# EAGLE board OpenBook_board v1 (EAGLE 9.7.0)
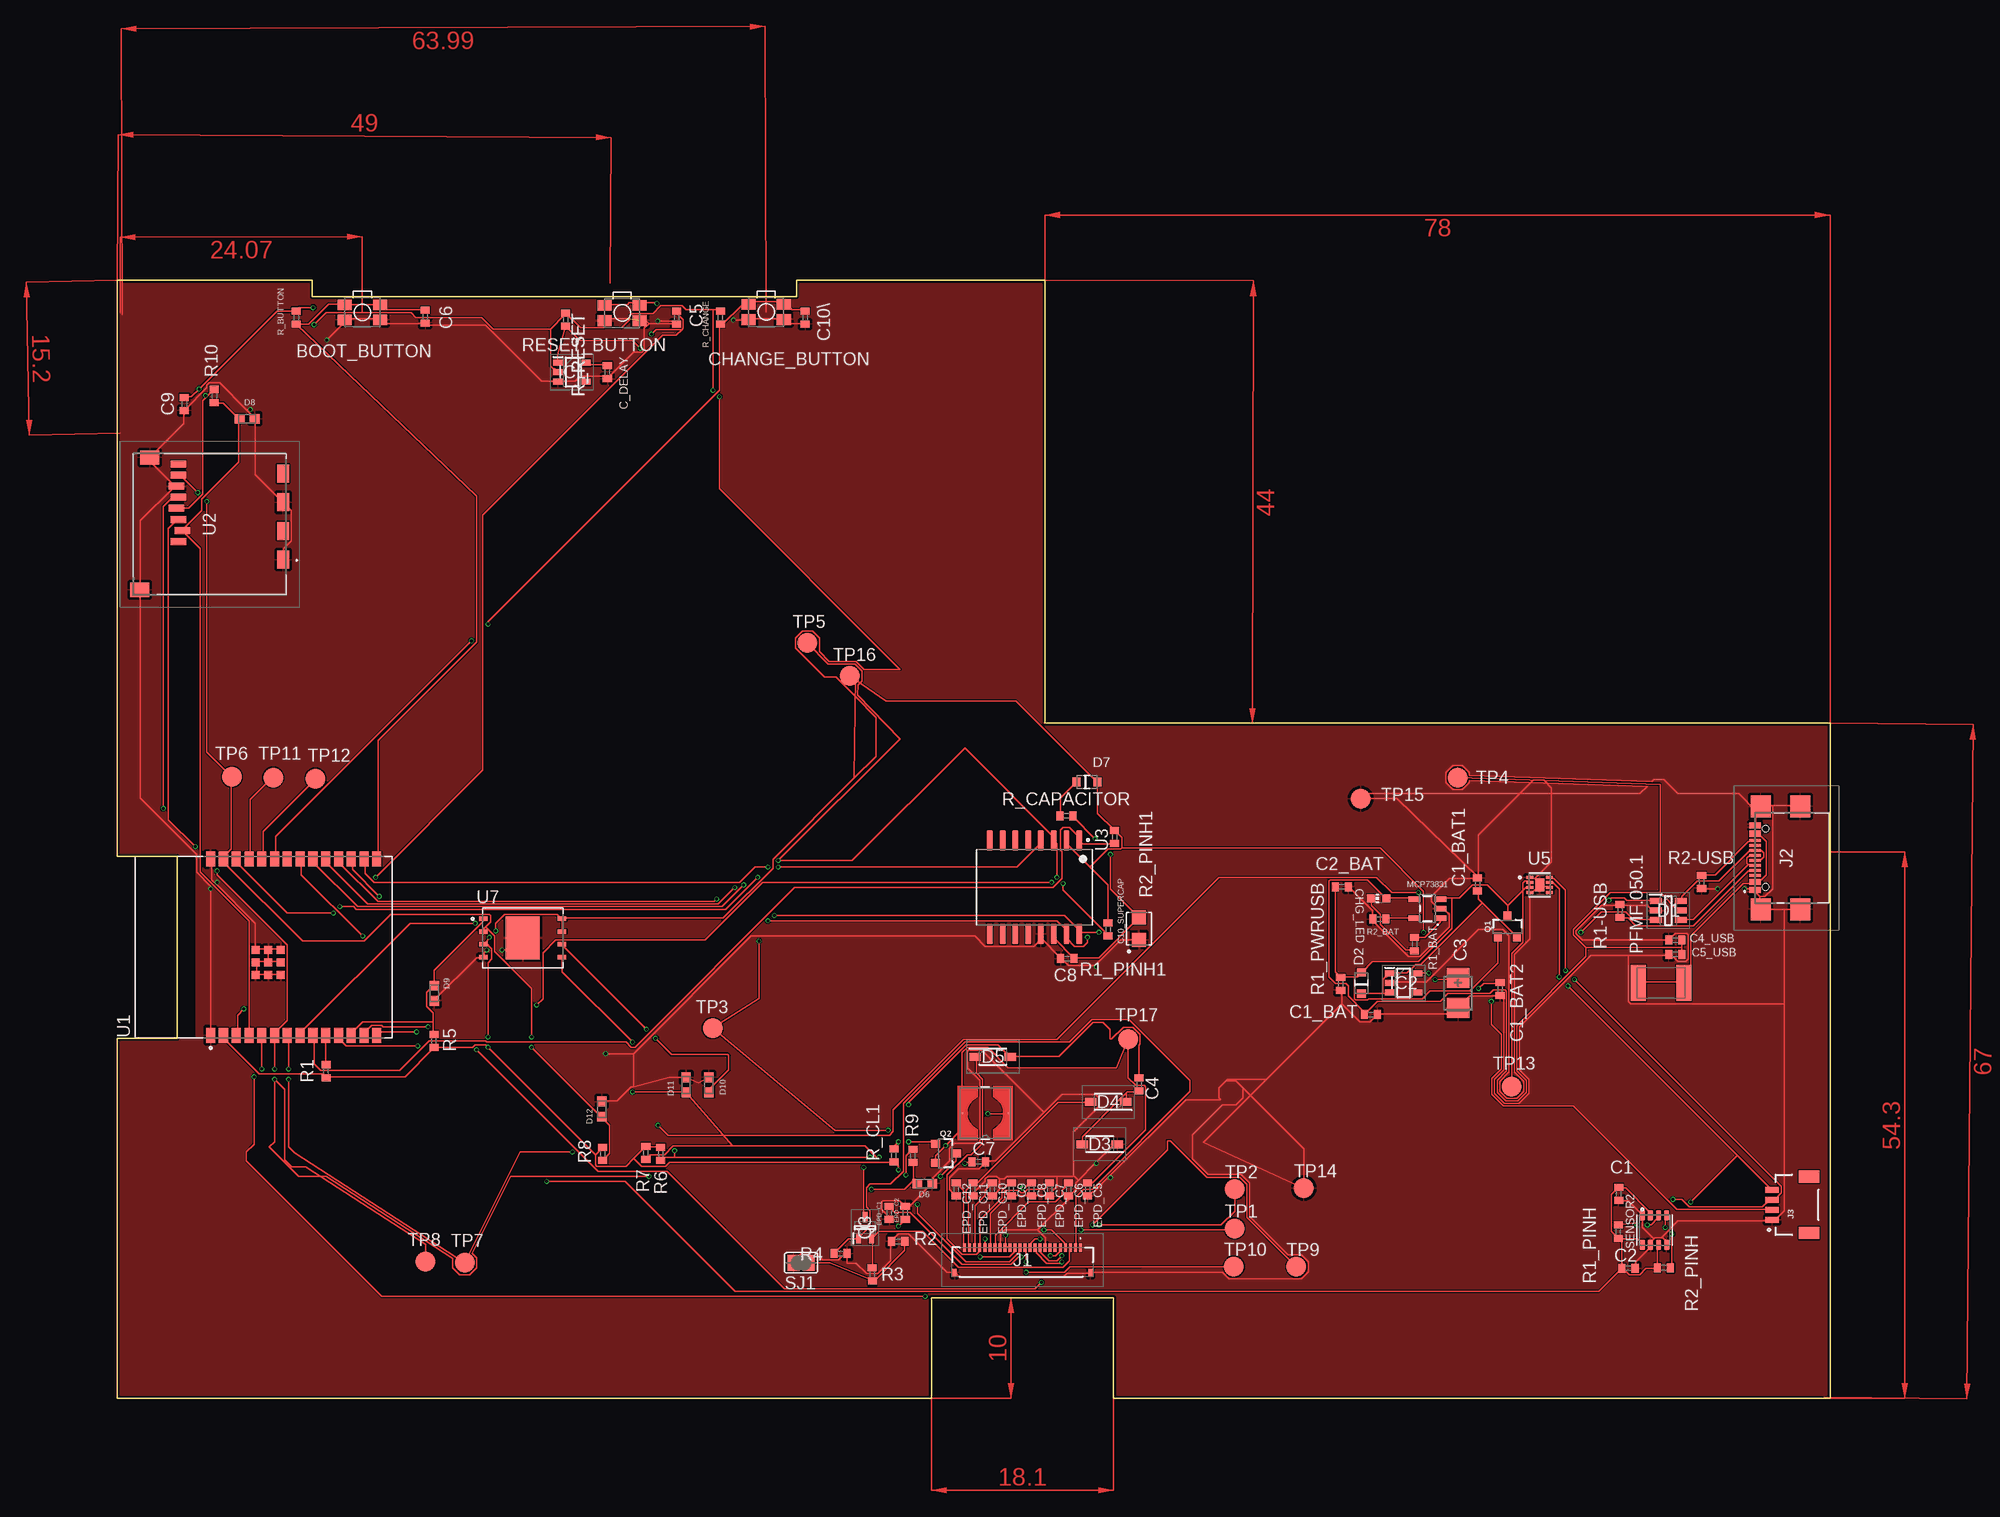
[diagram p0: board, top side]
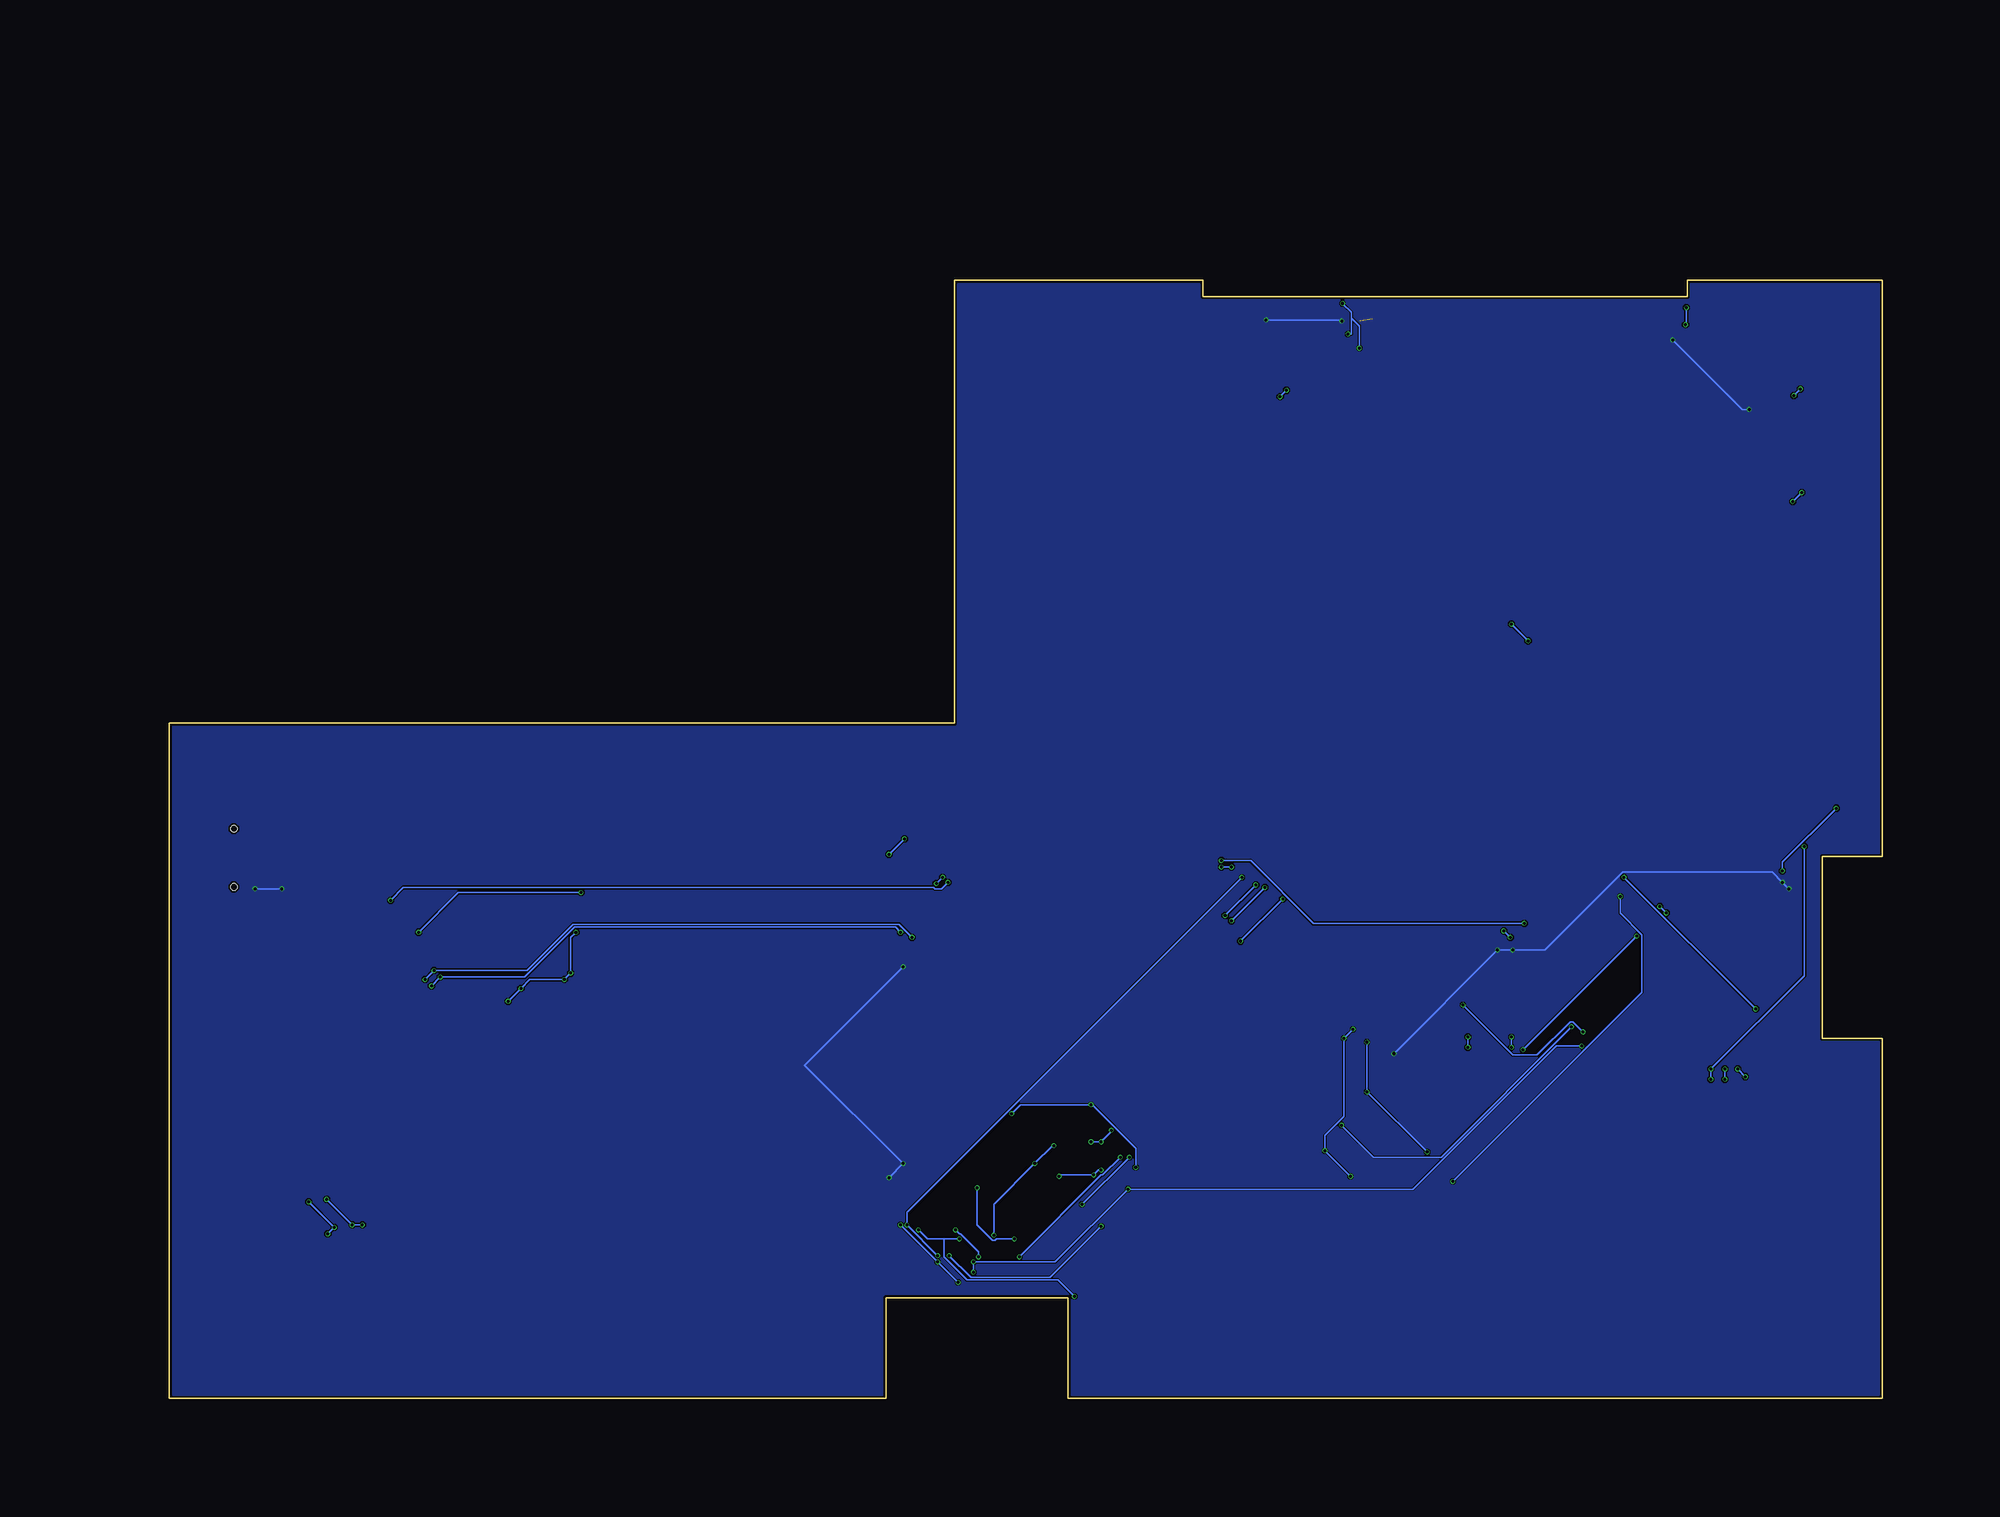
[diagram p1: board, bottom side, seen from below]

Size 170.2 x 111.1 mm. Coordinates in mm from the lower left corner, seen from the top.
Outline: 0,35.8 0,0 80.9,0 80.9,10 99,10 99,0 170.2,0 170.2,67.1 92.2,67.1 92.2,111.1 67.5,111.1 67.5,109.5 19.4,109.5 19.4,111.1 0,111.1 0,53.84 5.95,53.84 5.95,35.8 0,35.8
Copper layers (1*16): Top / Bottom
Stack-up Default Layer Stack: Top User Defined 0.035mm / Dielectric-1 User Defined 1.6mm / Bottom User Defined 0.035mm
Design rules: minimum copper width 5mil, minimum drill size 0.3mm, copper clearance wire_polygon to wire_polygon 5mil, copper clearance wire_polygon to pad_smd 5mil, copper clearance wire_polygon to via 5mil, copper clearance pad_smd to pad_smd 5mil, copper clearance pad_smd to via 5mil, copper clearance via to via 5mil, copper clearance smd to pad (same net) 5mil, copper clearance smd to via (same net) 5mil, copper clearance smd to smd (same net) 5mil, dimension clearance 0.2mm, via restrict clearance 0mil, restrict clearance 0mil, drill distance 6mil, keepout clearance 0mil

## Footprints (pad centres in the part's own frame; a part is rotated, then mirrored left to right if it is on the bottom)
MYBUTTON = smd 1.4 x 1.05: 1 1.75,0.75; 2 -1.75,0.75; 3 -1.75,-0.75; 4 1.75,-0.75
EAGLE-LTSPICE_C0402 = smd 0.7 x 0.9: 1 -0.65,0; 2 0.65,0
RCL_CT3528 = smd 2 x 2.2: + -1.5,0; - 1.5,0
CAPCP3225X100N = smd 1.4 x 1.4: 1 -1.1,0; 2 1.1,0
ADAFRUIT_CHIP-LED0603 = smd 0.8 x 0.8: A 0,-0.75; C 0,0.75
SOT95P280X145-6N = smd 1.2 x 0.6: 1 -1.25,0.95; 2 -1.25,0; 3 -1.25,-0.95; 4 1.25,-0.95; 5 1.25,0; 6 1.25,0.95
ESP32_WROVER_AVX---SD0805S020S1R0_AVX_SD0805S020S1R0_0 = smd 0.8 x 0.9: 1 -1.05,0; 2 1.05,0
SOD3716X135N = smd 1.15 x 0.8: 1 -1.75,0; 2 1.75,0
DIOC1608X36N = smd 0.97 x 0.94: 1 -0.75,0; 2 0.75,0
SOT95P280X125-5N = smd 0.9 x 0.6: 1 -1.4,0.95; 2 -1.4,0; 3 -1.4,-0.95; 4 1.4,-0.95; 5 1.4,0.95
SOT95P280X120-5N = smd 0.9 x 0.6: 1 -1.4,0.95; 2 -1.4,0; 3 -1.4,-0.95; 4 1.4,-0.95; 5 1.4,0.95
FH34SRJ24S05SH99 = smd 0.3 x 0.8: 1 5.75,1.45; 2 5.25,1.45; 3 4.75,1.45; 4 4.25,1.45; 5 3.75,1.45; 6 3.25,1.45; 7 2.75,1.45; 8 2.25,1.45; 9 1.75,1.45; 10 1.25,1.45; 11 0.75,1.45; 12 0.25,1.45; 13 -0.25,1.45; 14 -0.75,1.45; 15 -1.25,1.45; 16 -1.75,1.45; 17 -2.25,1.45; 18 -2.75,1.45; 19 -3.25,1.45; 20 -3.75,1.45; 21 -4.25,1.45; 22 -4.75,1.45; 23 -5.25,1.45; 24 -5.75,1.45 | smd 0.4 x 0.8: MP1 6.75,-1.05; MP2 -6.75,-1.05
SAMACSYS_PARTS_USB4110GFA = smd 0.3 x 1.15: A1 -3.35,3.678; A4 -2.55,3.678; A5 -1.25,3.678; A6 -0.25,3.678; A7 0.25,3.678; A8 1.25,3.678; A9 2.55,3.678; A12 3.35,3.678; B1 3.05,3.678; B4 2.25,3.678; B5 1.75,3.678; B6 0.75,3.678; B7 -0.75,3.678; B8 -1.75,3.678; B9 -2.25,3.678; B12 -3.05,3.678 | smd 2.18 x 2: MP1 -5.11,-0.827; MP2 5.11,-0.827; MP3 -5.11,3.103; MP4 5.11,3.103 | hole 0.65: -2.89,2.603; 2.89,2.603
JST04_1MM_RA = smd 0.6 x 1.35: 1 -1.5,0; 2 -0.5,0; 3 0.5,0; 4 1.5,0 | smd 1.2 x 2: NC1 2.8,-3.675; NC2 -2.8,-3.675
IND_4828-WE-TPC_WRE = smd 0.127 x 0.127: 1 -2.286,0; 2 2.286,0
ESP32_WROVER_SPARKFUN-IC-POWER_SOT23-5 = smd 0.55 x 1.2: 1 -0.95,-1.3; 2 0,-1.3; 3 0.95,-1.3; 4 0.95,1.3; 5 -0.95,1.3
ESP32C6_VARISTOR_CT/CN1812 = smd 1.5 x 3.6: 1 -2.25,0; 2 2.25,0
ESP32_WROVER_SPARKFUN-DISCRETESEMI_SOT23-3 = smd 0.8 x 0.9: 1 -0.95,-1; 2 0.95,-1; 3 0,1.1
SOT65P210X110-3N = smd 1.05 x 0.5: 1 -1.05,0.65; 2 -1.05,-0.65; 3 1.05,0
ESP32_WROVER_EAGLE-LTSPICE_R0402 = smd 0.7 x 0.9: 1 -0.65,0; 2 0.65,0
ESP32_WROVER_BME680_PSON80P300X300X100-8N = smd 1.016 x 0.5: 1 1.458,1.2; 2 1.458,0.4; 3 1.458,-0.4; 4 1.458,-1.2; 5 -1.458,-1.22; 6 -1.458,-0.4; 7 -1.458,0.4; 8 -1.458,1.2
SJ = smd 1.168 x 1.6: 1 -0.762,0; 2 0.762,0
TP20R = smd 2 x 2: TP 0,0
XCVR_ESP32-C6-WROOM-1-N8 = smd 1.5 x 0.9: 1 -8.75,5.26; 2 -8.75,3.99; 3 -8.75,2.72; 4 -8.75,1.45; 5 -8.75,0.18; 6 -8.75,-1.09; 7 -8.75,-2.36; 8 -8.75,-3.63; 9 -8.75,-4.9; 10 -8.75,-6.17; 11 -8.75,-7.44; 12 -8.75,-8.71; 13 -8.75,-9.98; 14 -8.75,-11.25; 15 8.75,-11.25; 16 8.75,-9.98; 17 8.75,-8.71; 18 8.75,-7.44; 19 8.75,-6.17; 20 8.75,-4.9; 21 8.75,-3.63; 22 8.75,-2.36; 23 8.75,-1.09; 24 8.75,0.18; 25 8.75,1.45; 26 8.75,2.72; 27 8.75,3.99; 28 8.75,5.26 | smd 0.8 x 0.8: 29_1 -2.755,0.79; 29_2 -1.505,0.79; 29_3 -0.255,0.79; 29_4 -2.755,-0.46; 29_5 -1.505,-0.46; 29_6 -0.255,-0.46; 29_7 -2.755,-1.71; 29_8 -1.505,-1.71; 29_9 -0.255,-1.71
112ATAARR03ATTEND = smd 1.8 x 1.2: G1 10.6,10.4; G2 4.9,10.4; S1 7.75,10.4; S2 2.05,10.4 | smd 1.4 x 1.9: G3 13.6,-3.85; G4 0.45,-2.85 | smd 0.7 x 1.5: P1 8.8,0; P2 7.7,0.4; P3 6.6,0; P4 5.5,-0.2; P5 4.4,0; P6 3.3,-0.2; P7 2.2,0; P8 1.1,0
SOIC127P1032X265-16N = smd 2.05 x 0.59: 1 -4.655,4.445; 2 -4.655,3.175; 3 -4.655,1.905; 4 -4.655,0.635; 5 -4.655,-0.635; 6 -4.655,-1.905; 7 -4.655,-3.175; 8 -4.655,-4.445; 9 4.655,-4.445; 10 4.655,-3.175; 11 4.655,-1.905; 12 4.655,-0.635; 13 4.655,0.635; 14 4.655,1.905; 15 4.655,3.175; 16 4.655,4.445
SON50P200X200X80-9N = smd 0.76 x 0.27: 1 -0.985,0.75; 2 -0.985,0.25; 3 -0.985,-0.25; 4 -0.985,-0.75; 5 0.985,-0.75; 6 0.985,-0.25; 7 0.985,0.25; 8 0.985,0.75 | smd 0.9 x 1.3: 9 0,0
SON127P600X800X80-9N = smd 0.94 x 0.44: 1 -3.895,1.905; 2 -3.895,0.635; 3 -3.895,-0.635; 4 -3.895,-1.905; 5 3.895,-1.905; 6 3.895,-0.635; 7 3.895,0.635; 8 3.895,1.905 | smd 3.4 x 4.3: 9 0,0

## Placement (x,y rotation side)
BOOT_BUTTON  [MYBUTTON]  24.37,107.93 180 top
C1  100nF  [EAGLE-LTSPICE_C0402]  149.19,20.34 270 top
C1_BAT  4.7uF  [EAGLE-LTSPICE_C0402]  124.58,38.14 0 top
C1_BAT1  4.7uF  [EAGLE-LTSPICE_C0402]  135.17,51.08 90 top
C1_BAT2  4.7uF  [EAGLE-LTSPICE_C0402]  137.41,40.68 270 top
C2  100nF  [EAGLE-LTSPICE_C0402]  150.17,12.94 0 top
C2_BAT  4.7uF  [EAGLE-LTSPICE_C0402]  121.69,50.84 0 top
C3  100uF  [RCL_CT3528]  133.24,40.29 270 top
C4  4.7uF/25V  [EAGLE-LTSPICE_C0402]  101.53,31.2 90 top
C4_USB  100nF  [EAGLE-LTSPICE_C0402]  154.82,45.54 180 top
C5  1uF  [EAGLE-LTSPICE_C0402]  55.59,107.41 270 top
C5_USB  4.7uF  [EAGLE-LTSPICE_C0402]  154.81,44.14 180 top
C6  100nF  [EAGLE-LTSPICE_C0402]  30.62,107.51 270 top
C7  10uF  [EAGLE-LTSPICE_C0402]  85.61,23.52 0 top
C8  100nF  [EAGLE-LTSPICE_C0402]  94.4,43.72 180 top
C9  100nF  [EAGLE-LTSPICE_C0402]  6.68,98.82 270 top
C10\  100nF  [EAGLE-LTSPICE_C0402]  68.36,107.41 270 top
C10_SUPERCAP  CPH3225A  [CAPCP3225X100N]  101.53,46.68 90 top
C_DELAY  100nF  [EAGLE-LTSPICE_C0402]  48.71,101.98 270 top
CHANGE_BUTTON  [MYBUTTON]  64.49,107.95 180 top
CHG_LED  [ADAFRUIT_CHIP-LED0603]  125.35,49.69 90 top
D1  USBLC6-2SC6Y  [SOT95P280X145-6N]  154.12,48.48 0 top
D2  ESP32_WROVER_AVX---SD0805S020S1R0_AVX_SD0805S020S1R0_0_0AVX_SD0805S020S1R0_0_0  [ESP32_WROVER_AVX---SD0805S020S1R0_AVX_SD0805S020S1R0_0]  123.61,41.27 90 top
D3  MBR0530  [SOD3716X135N]  97.63,25.26 180 top
D4  MBR0530  [SOD3716X135N]  98.47,29.46 180 top
D5  MBR0530  [SOD3716X135N]  87.01,33.96 0 top
D6  PGB1010603MR  [DIOC1608X36N]  80.25,21.36 0 top
D7  ESP32_WROVER_AVX---SD0805S020S1R0_AVX_SD0805S020S1R0_0_0AVX_SD0805S020S1R0_0_0  [ESP32_WROVER_AVX---SD0805S020S1R0_AVX_SD0805S020S1R0_0]  96.36,61.27 0 top
D8  PGB1010603MR  [DIOC1608X36N]  12.93,97.36 0 top
D9  PGB1010603MR  [DIOC1608X36N]  31.51,40.26 270 top
D10  PGB1010603MR  [DIOC1608X36N]  58.79,31.16 90 top
D11  PGB1010603MR  [DIOC1608X36N]  56.53,31.16 90 top
D12  PGB1010603MR  [DIOC1608X36N]  48.15,28.76 90 top
EPD_C1  1uF/50V  [EAGLE-LTSPICE_C0402]  76.7,18.46 270 top
EPD_C2  1uF/50V  [EAGLE-LTSPICE_C0402]  78.31,18.46 90 top
EPD_C5  1uF/50V  [EAGLE-LTSPICE_C0402]  96.42,20.76 270 top
EPD_C6  1uF/50V  [EAGLE-LTSPICE_C0402]  94.53,20.76 270 top
EPD_C7  1uF/50V  [EAGLE-LTSPICE_C0402]  92.64,20.76 270 top
EPD_C8  1uF/50V  [EAGLE-LTSPICE_C0402]  90.85,20.76 270 top
EPD_C9  1uF/50V  [EAGLE-LTSPICE_C0402]  88.86,20.76 270 top
EPD_C10  1uF/50V  [EAGLE-LTSPICE_C0402]  86.95,20.78 270 top
EPD_C11  1uF/50V  [EAGLE-LTSPICE_C0402]  85.03,20.78 270 top
EPD_C12  1uF/50V  [EAGLE-LTSPICE_C0402]  83.38,20.78 270 top
IC1  BD5229G-TR  [SOT95P280X125-5N]  45.19,101.98 0 top
IC2  XC6220A331MR-G  [SOT95P280X120-5N]  127.83,41.28 0 top
J1  FH34SRJ-24S-0.5SH_99_  [FH34SRJ24S05SH99]  89.96,13.54 0 top
J2  [SAMACSYS_PARTS_USB4110GFA]  166.41,53.71 90 top
J3  QWIIC_RIGHT_ANGLE  [JST04_1MM_RA]  164.43,19.24 90 top
L1  744043680IND_4828-WE-TPC_WRE  [IND_4828-WE-TPC_WRE]  86.27,28.35 180 top
MCP73831  [ESP32_WROVER_SPARKFUN-IC-POWER_SOT23-5]  130.18,48.68 90 top
PFMF.050.1  [ESP32C6_VARISTOR_CT/CN1812]  153.41,41.28 0 top
Q1  20V/4.2A/52mΩ/1.4W  [ESP32_WROVER_SPARKFUN-DISCRETESEMI_SOT23-3]  138.13,46.86 0 top
Q2  20V/4.2A/52mΩ/1.4W  [ESP32_WROVER_SPARKFUN-DISCRETESEMI_SOT23-3]  82.3,24.36 270 top
Q3  SI1308EDL-T1-GE3  [SOT65P210X110-3N]  74.31,16.97 90 top
R1  10K  [ESP32_WROVER_EAGLE-LTSPICE_R0402]  20.77,32.52 90 top
R1-USB  5k1  [ESP32_WROVER_EAGLE-LTSPICE_R0402]  149.32,48.44 270 top
R1_BAT  200  [ESP32_WROVER_EAGLE-LTSPICE_R0402]  128.9,45.14 270 top
R1_PINH  10K  [ESP32_WROVER_EAGLE-LTSPICE_R0402]  149.15,16.58 270 top
R1_PINH1  10K  [ESP32_WROVER_EAGLE-LTSPICE_R0402]  98.45,46.6 90 top
R1_PWRUSB  100k  [ESP32_WROVER_EAGLE-LTSPICE_R0402]  121.57,41.2 90 top
R2  2.2  [ESP32_WROVER_EAGLE-LTSPICE_R0402]  77.61,15.6 0 top
R2-USB  5k1  [ESP32_WROVER_EAGLE-LTSPICE_R0402]  157.43,51.34 270 top
R2_BAT  2K  [ESP32_WROVER_EAGLE-LTSPICE_R0402]  125.41,47.64 0 top
R2_PINH  10K  [ESP32_WROVER_EAGLE-LTSPICE_R0402]  153.69,12.98 180 top
R2_PINH1  10K  [ESP32_WROVER_EAGLE-LTSPICE_R0402]  99.11,55.8 90 top
R3  0.47  [ESP32_WROVER_EAGLE-LTSPICE_R0402]  75.03,12.32 91 top
R4  10k  [ESP32_WROVER_EAGLE-LTSPICE_R0402]  71.89,14.4 180 top
R5  10K  [ESP32_WROVER_EAGLE-LTSPICE_R0402]  31.49,35.52 270 top
R6  10K  [ESP32_WROVER_EAGLE-LTSPICE_R0402]  54.01,24.32 90 top
R7  10K  [ESP32_WROVER_EAGLE-LTSPICE_R0402]  52.53,24.42 90 top
R8  10K  [ESP32_WROVER_EAGLE-LTSPICE_R0402]  48.25,24.32 90 top
R9  10K  [ESP32_WROVER_EAGLE-LTSPICE_R0402]  79.07,24.12 90 top
R10  10K  [ESP32_WROVER_EAGLE-LTSPICE_R0402]  9.65,99.62 90 top
R_BUTTON  10K  [ESP32_WROVER_EAGLE-LTSPICE_R0402]  17.81,107.41 270 top
R_CAPACITOR  15  [ESP32_WROVER_EAGLE-LTSPICE_R0402]  94.34,57.88 0 top
R_CHANGE  10K  [ESP32_WROVER_EAGLE-LTSPICE_R0402]  59.94,107.41 270 top
R_CL1  10K  [ESP32_WROVER_EAGLE-LTSPICE_R0402]  77.19,24.14 90 top
R_RESET  10K  [ESP32_WROVER_EAGLE-LTSPICE_R0402]  44.57,107.21 270 top
RESET_BUTTON  [MYBUTTON]  50.18,107.85 180 top
SENSOR2  BME688  [ESP32_WROVER_BME680_PSON80P300X300X100-8N]  152.75,16.73 90 top
SJ1  [SJ]  67.96,13.48 0 top
TP1  TPTP20R  [TP20R]  111.03,16.9 0 top
TP2  TPTP20R  [TP20R]  111.05,20.8 0 top
TP3  TPTP20R  [TP20R]  59.17,36.8 0 top
TP4  TPTP20R  [TP20R]  133.19,61.7 0 top
TP5  TPTP20R  [TP20R]  68.59,75.08 0 top
TP6  TPTP20R  [TP20R]  11.41,61.78 0 top
TP7  TPTP20R  [TP20R]  34.53,13.48 0 top
TP8  TPTP20R  [TP20R]  30.65,13.58 0 top
TP9  TPTP20R  [TP20R]  117.17,13.08 0 top
TP10  TPTP20R  [TP20R]  110.96,13.1 0 top
TP11  TPTP20R  [TP20R]  15.51,61.7 0 top
TP12  TPTP20R  [TP20R]  19.71,61.6 0 top
TP13  TPTP20R  [TP20R]  138.56,31 0 top
TP14  TPTP20R  [TP20R]  117.91,20.9 0 top
TP15  TPTP20R  [TP20R]  123.56,59.6 0 top
TP16  TPTP20R  [TP20R]  72.81,71.8 0 top
TP17  TPTP20R  [TP20R]  100.46,35.7 0 top
U1  ESP32-C6-WROOM-1-N8  [XCVR_ESP32-C6-WROOM-1-N8]  14.55,44.84 90 top
U2  112A-TAAR-R03_ATTEND  [112ATAARR03ATTEND]  6.09,93.95 270 top
U3  DS3231SN#  [SOIC127P1032X265-16N]  91.15,50.8 270 top
U5  MAX17048G+T10  [SON50P200X200X80-9N]  141.34,51.03 0 top
U7  W25Q512JVEIQ  [SON127P600X800X80-9N]  40.3,45.76 0 top

## Library data of the parts
BOOT_BUTTON CHANGE_BUTTON CHG_LED PFMF.050.1 RESET_BUTTON SJ1 TP1-TP17 = DeskAssistant v19 v1
C1 C1_BAT C1_BAT1 C1_BAT2 C2 C2_BAT C4 C4_USB C5 C5_USB C6-C9 C10\ C_DELAY EPD_C1 EPD_C2 EPD_C5-EPD_C12 = DeskAssistant v19 v1; SPICEMODEL: NONE; SPICEPREFIX: C
C3 = DeskAssistant v19 v1; SPICEPREFIX: C
C10_SUPERCAP = DeskAssistant v19 v1; AVAILABILITY: Not in stock; CHECK_PRICES: https://www.snapeda.com/parts/CPH3225A/Seiko+Instruments/view-part/?ref=eda; DESCRIPTION: 11 mF (EDLC) Supercapacitor 3.3 V 1210 (3225 Metric) - -; MF: Seiko Instruments; MP: CPH3225A; PACKAGE: 1210 Seiko; PRICE: None; PURCHASE-URL: https://www.snapeda.com/api/url_track_click_mouser/?unipart_id=562593&manufacturer=Seiko Instruments&part_name=CPH3225A&search_term=None; SNAPEDA_LINK: https://www.snapeda.com/parts/CPH3225A/Seiko+Instruments/view-part/?ref=snap
D1 = DeskAssistant v19 v1; AVAILABILITY: In Stock; CHECK_PRICES: https://www.snapeda.com/parts/USBLC6-2SC6Y/STMicroelectronics/view-part/?ref=eda; DESCRIPTION: 17V Clamp 5A (8/20µs) Ipp Tvs Diode Surface Mount SOT-23-6; MF: STMicroelectronics; MP: USBLC6-2SC6Y; PACKAGE: SOT-23-6 STMicroelectronics; PRICE: None; SNAPEDA_LINK: https://www.snapeda.com/parts/USBLC6-2SC6Y/STMicroelectronics/view-part/?ref=snap
D2 D7 = DeskAssistant v19 v1; CENTROID_NOT_SPECIFIED: No; DATASHEET: http://datasheets.avx.com/schottky.pdf; DIGIKEY_DESCRIPTION: DIODE SCHOTTKY 20V 1A 0805; DIGIKEY_PART_NUMBER: 478-7800-1-ND; LEAD_FREE: yes; MF: AVX; MOUSER_PART_NUMBER: 581-SD0805S020S1R0; PACKAGE: 0805 (2012 metric); PREFIX: D; ROHS: yes; TEMPERATURE_RANGE_HIGH: +125°C; TEMPERATURE_RANGE_LOW: -55°C
D3-D5 = DeskAssistant v19 v1; AVAILABILITY: In Stock; CHECK_PRICES: https://www.snapeda.com/parts/MBR0530/Onsemi/view-part/?ref=eda; DESCRIPTION: Diode Schottky 30 V 500mA Surface Mount SOD-123; MF: ON Semiconductor; MP: MBR0530; PACKAGE: SOD-123-2 ON Semiconductor; PRICE: None; PURCHASE-URL: https://www.snapeda.com/api/url_track_click_mouser/?unipart_id=179458&manufacturer=ON Semiconductor&part_name=MBR0530&search_term=None; SNAPEDA_LINK: https://www.snapeda.com/parts/MBR0530/Onsemi/view-part/?ref=snap
D6 D8-D12 = DeskAssistant v19 v1; AVAILABILITY: In Stock; CHECK_PRICES: https://www.snapeda.com/parts/PGB1010603MR/Littelfuse/view-part/?ref=eda; DESCRIPTION: 150V (Typ) Clamp - Ipp Tvs Diode Surface Mount 0603 (1608 Metric); MF: Littelfuse Inc.; MP: PGB1010603MR; PACKAGE: 0603 Littelfuse Inc.; PRICE: None; PURCHASE-URL: https://www.snapeda.com/api/url_track_click_mouser/?unipart_id=5659453&manufacturer=Littelfuse Inc.&part_name=PGB1010603MR&search_term=None; SNAPEDA_LINK: https://www.snapeda.com/parts/PGB1010603MR/Littelfuse/view-part/?ref=snap
IC1 = DeskAssistant v19 v1; DESCRIPTION: Voltage Detector with Adjustable Delay Time: CMOS processes are utilized to develop high precision, low current consumption CMOS reset ICs that allow arbitrary setting of the delay time. The extensive lineup includes both Nch Open Drain and CMOS output types in a wide range of detection voltages (from 2.3V to 6.0V, in 0.1V steps), enabling selection of the ideal solution based on customer requirements. In addition, the entire series is of course both lead-free and RoHS-compliant.; HEIGHT: 1.25mm; MANUFACTURER_NAME: ROHM Semiconductor; MANUFACTURER_PART_NUMBER: BD5229G-TR; MOUSER_PART_NUMBER: 755-BD5229G-TR; MOUSER_PRICE-STOCK: https://www.mouser.co.uk/ProductDetail/ROHM-Semiconductor/BD5229G-TR?qs=4kLU8WoGk0vvnhrrYwdszw%3D%3D
IC2 = DeskAssistant v19 v1; DESCRIPTION: LDO Voltage Regulators; HEIGHT: 1.2mm; MANUFACTURER_NAME: Torex; MANUFACTURER_PART_NUMBER: XC6220A331MR-G; MOUSER_PART_NUMBER: 865-XC6220A331MR-G; MOUSER_PRICE-STOCK: https://www.mouser.co.uk/ProductDetail/Torex-Semiconductor/XC6220A331MR-G?qs=AsjdqWjXhJ8ZSWznL1J0gg%3D%3D
J1 = DeskAssistant v19 v1; DESCRIPTION: 24 Position FFC, FPC Connector Contacts, Top and Bottom 0.020" (0.50mm) Surface Mount, Right Angle; HEIGHT: 1.1mm; MANUFACTURER_NAME: Hirose; MANUFACTURER_PART_NUMBER: FH34SRJ-24S-0.5SH(99); MOUSER_PART_NUMBER: 798-FH34SRJ24S05SH99; MOUSER_PRICE-STOCK: https://www.mouser.co.uk/ProductDetail/Hirose-Connector/FH34SRJ-24S-0.5SH99?qs=vcbW%252B4%252BSTIpKBl5ap9J8Fw%3D%3D
J2 = DeskAssistant v19 v1; DESCRIPTION: CONN USB 2.0 TYPE-C R/A SMT; HEIGHT: 3.26mm; MANUFACTURER_NAME: GCT (GLOBAL CONNECTOR TECHNOLOGY); MANUFACTURER_PART_NUMBER: USB4110-GF-A; MOUSER_PART_NUMBER: 640-USB4110-GF-A; MOUSER_PRICE-STOCK: https://www.mouser.co.uk/ProductDetail/GCT/USB4110-GF-A?qs=KUoIvG%2F9IlYiZvIXQjyJeA%3D%3D
J3 = DeskAssistant v19 v1; PROD_ID: CONN-13694
L1 = DeskAssistant v19 v1; COPYRIGHT: Copyright (C) 2024 Ultra Librarian. All rights reserved.; MANUFACTURER_PART_NUMBER: 744043680; MFR_NAME: Wurth Electronics
MCP73831 = DeskAssistant v19 v1; PROD_ID: IC-09995
Q1 Q2 = DeskAssistant v19 v1; PROD_ID: TRAN-14388
Q3 = DeskAssistant v19 v1; AVAILABILITY: In Stock; CHECK_PRICES: https://www.snapeda.com/parts/SI1308EDL-T1-GE3/Vishay+Siliconix/view-part/?ref=eda; DESCRIPTION: Si1308EDL-T1-GE3 N-channel MOSFET Transistor, 1.5 A, 30 V, 3-Pin SC-70 | Siliconix / Vishay SI1308EDL-T1-GE3; MF: Vishay Siliconix; MP: SI1308EDL-T1-GE3; PACKAGE: SOT-323 Vishay Semiconductor; PRICE: None; PURCHASE-URL: https://www.snapeda.com/api/url_track_click_mouser/?unipart_id=274603&manufacturer=Vishay Siliconix&part_name=SI1308EDL-T1-GE3&search_term=None; SNAPEDA_LINK: https://www.snapeda.com/parts/SI1308EDL-T1-GE3/Vishay+Siliconix/view-part/?ref=snap
R1 R1-USB R1_BAT R1_PINH R1_PINH1 R1_PWRUSB R2 R2-USB R2_BAT R2_PINH R2_PINH1 R3-R10 R_BUTTON R_CAPACITOR R_CHANGE R_CL1 R_RESET = DeskAssistant v19 v1; SPICEMODEL: NONE; SPICEPREFIX: R
SENSOR2 = DeskAssistant v19 v1; AVAILABILITY: Unavailable; DESCRIPTION: Integrated Environmental Unit; MF: Bosch Sensortec; MP: BME680; PACKAGE: LGA-8 Bosch Tools; PRICE: None
U1 = DeskAssistant v19 v1; AVAILABILITY: In Stock; CHECK_PRICES: https://www.snapeda.com/parts/ESP32-C6-WROOM-1-N8/Espressif+Systems/view-part/?ref=eda; DESCRIPTION: Multiprotocol Modules ESP32-C6 module, Wi-Fi 6 in 2.4 GHz band, Bluetooth 5, Zigbee 3.0 and Thread. ESP34-WROOM Compatible - ENGINEERING SAMPLE; MF: Espressif Systems; MP: ESP32-C6-WROOM-1-N8; PACKAGE: None; PRICE: None; SNAPEDA_LINK: https://www.snapeda.com/parts/ESP32-C6-WROOM-1-N8/Espressif+Systems/view-part/?ref=snap
U2 = DeskAssistant v19 v1; DESCRIPTION: Micro SD Card Socket, Push-Push Type, Top Mount, SMT, H=1.83mm, 10u; HEIGHT: 1.9mm; MANUFACTURER_NAME: ATTEND; MANUFACTURER_PART_NUMBER: 112A-TAAR-R03 ATTEND
U3 = DeskAssistant v19 v1; AVAILABILITY: In Stock; CHECK_PRICES: https://www.snapeda.com/parts/DS3231SN%23/Analog+Devices/view-part/?ref=eda; DESCRIPTION: Extremely Accurate I²C-Integrated RTC/TCXO/Crystal; MF: Analog Devices; MP: DS3231SN#; PACKAGE: SOIC-16 Maxim; PRICE: None; PURCHASE-URL: https://www.snapeda.com/api/url_track_click_mouser/?unipart_id=99048&manufacturer=Analog Devices&part_name=DS3231SN#&search_term=None; SNAPEDA_LINK: https://www.snapeda.com/parts/DS3231SN%23/Analog+Devices/view-part/?ref=snap
U5 = DeskAssistant v19 v1; AVAILABILITY: In Stock; CHECK_PRICES: https://www.snapeda.com/parts/MAX17048G+T10/Analog+Devices/view-part/?ref=eda; DESCRIPTION: 3µA 1-Cell/2-Cell Fuel Gauge with ModelGauge; MF: Analog Devices; MP: MAX17048G+T10; PACKAGE: TDFN-8 Maxim; PRICE: None; PURCHASE-URL: https://www.snapeda.com/api/url_track_click_mouser/?unipart_id=329239&manufacturer=Analog Devices&part_name=MAX17048G+T10&search_term=None; SNAPEDA_LINK: https://www.snapeda.com/parts/MAX17048G+T10/Analog+Devices/view-part/?ref=snap
U7 = DeskAssistant v19 v1; AVAILABILITY: In Stock; CHECK_PRICES: https://www.snapeda.com/parts/W25Q512JVEIQ/Winbond+Electronics/view-part/?ref=eda; DESCRIPTION: FLASH - NOR Memory IC 512Mb (64M x 8) SPI - Quad I/O 133 MHz 8-WSON (8x6); MF: Winbond Electronics; MP: W25Q512JVEIQ; PACKAGE: Package; PRICE: None; SNAPEDA_LINK: https://www.snapeda.com/parts/W25Q512JVEIQ/Winbond+Electronics/view-part/?ref=snap

## Nets
3V3: C1_BAT2.1 C3.+ C9.1 D7.2 IC1.2 IC2.5 J3.2 Q2.3 R1.1 R1_PINH1.2 R2_PINH1.2 R5.2 R6.2 R7.2 R8.2 R9.2 R10.2 R_BUTTON.1 R_CHANGE.1 R_CL1.1 R_RESET.1 TP16.TP U1.2 U2.P4 U3.2 U7.3 U7.7 U7.8
32KHZ: R2_PINH1.1 U1.9 U3.1
DN: D1.4 J2.A7 J2.B7
DP: D1.6 J2.A6 J2.B6
EPD_3V3: C7.1 EPD_C5.1 J1.15 J1.16 L1.2 Q2.2 TP17.TP
EPD_3V3_C: Q2.1 R_CL1.2 TP3.TP U1.18
EPD_BUSY: J1.9 TP9.TP U1.26
EPD_CS: D6.1 J1.12 R9.1 TP10.TP U1.11
EPD_DC: J1.11 TP1.TP U1.5
EPD_RST: J1.10 TP2.TP U1.21
FLASH_CS: D9.1 R5.1 U1.12 U7.1
GDR: J1.2 Q3.1 R4.2
GND: BOOT_BUTTON.1 BOOT_BUTTON.2 C1.2 C1_BAT1.2 C1_BAT2.2 C1_BAT.2 C2.2 C2_BAT.2 C3.- C4_USB.2 C5.2 C5_USB.2 C6.2 C7.2 C8.2 C9.2 C10\.2 C10_SUPERCAP.1 C_DELAY.2 CHANGE_BUTTON.1 CHANGE_BUTTON.2 D1.2 D3.1 D6.2 D8.2 D9.2 D10.2 D11.2 D12.2 EPD_C1.2 EPD_C2.2 EPD_C5.2 EPD_C6.2 EPD_C7.2 EPD_C8.2 EPD_C9.2 EPD_C10.2 EPD_C11.2 EPD_C12.2 IC1.3 IC2.2 J1.8 J1.17 J1.MP1 J1.MP2 J2.A1 J2.A12 J2.B1 J2.B12 J2.MP1 J2.MP2 J2.MP3 J2.MP4 J3.1 MCP73831.2 R1-USB.1 R1_PWRUSB.1 R2-USB.2 R2.1 R2_BAT.1 R4.1 RESET_BUTTON.1 RESET_BUTTON.2 SENSOR2.1 SENSOR2.5 SENSOR2.7 SJ1.1 TP14.TP TP15.TP U1.1 U1.28 U1.29_1 U1.29_2 U1.29_3 U1.29_4 U1.29_5 U1.29_6 U1.29_7 U1.29_8 U1.29_9 U2.G1 U2.G2 U2.G3 U2.G4 U2.P6 U3.13 U5.1 U5.4 U5.6 U5.9 U7.4 U7.9
GPIO8: R1.2 U1.10
I2C_PW: C1.1 C2.1 R1_PINH.2 R2_PINH.2 SENSOR2.2 SENSOR2.6 SENSOR2.8 U1.17
INT_RTC: R1_PINH1.1 TP5.TP U1.8 U3.3
IO/BOOT: BOOT_BUTTON.3 BOOT_BUTTON.4 C6.1 R_BUTTON.2 U1.15
IO/CHANGE: C10\.1 CHANGE_BUTTON.3 CHANGE_BUTTON.4 R_CHANGE.2 U1.23
MISO: D12.1 R8.1 TP6.TP U1.27 U2.P7 U7.2
MOSI: D11.1 J1.14 R7.1 TP7.TP U1.7 U2.P3 U7.5
N$1: J2.B5 R2-USB.1
N$2: J2.A5 R1-USB.2
N$3: MCP73831.5 R2_BAT.2
N$4: EPD_C2.1 J1.5
N$5: C1_BAT1.1 D2.1 IC2.1 IC2.3 Q1.2
N$6: MCP73831.1 R1_BAT.1
N$7: C4.1 D3.2 D4.1
N$8: CHG_LED.C R1_BAT.2
N$9: EPD_C1.1 J1.4
N$10: EPD_C12.1 J1.24
N$11: C_DELAY.1 IC1.5
N$12: EPD_C10.1 J1.22
N$13: D7.1 R_CAPACITOR.1
N$14: EPD_C8.1 J1.20
N$15: EPD_C7.1 J1.19
N$16: EPD_C6.1 J1.18
PREVGH: D5.1 EPD_C9.1 J1.21
PREVGL: D4.2 EPD_C11.1 J1.23
RESE: J1.3 Q3.2 R3.2
RESE': R2.2 R3.1 SJ1.2
RESET: C5.1 IC1.1 R_RESET.2 RESET_BUTTON.3 RESET_BUTTON.4 U1.3
RTC_RST: U1.16 U3.4
RX: TP12.TP U1.24
SCK: D10.1 J1.13 R6.1 TP8.TP U1.6 U2.P5 U7.6
SCL: J3.4 R2_PINH.1 SENSOR2.4 U1.20 U3.16 U5.7
SDA: J3.3 R1_PINH.1 SENSOR2.3 U1.19 U3.15 U5.8
SRC: C4.2 D5.2 L1.1 Q3.3
SS_SD: D8.1 R10.1 U1.4 U2.P2
TX: TP11.TP U1.25
USB_D+: D1.1 U1.14
USB_D-: D1.3 U1.13
VBAT: C2_BAT.1 D2.2 MCP73831.3 Q1.1 Q1.3 R1_PWRUSB.2 TP13.TP U5.2 U5.3
VBUS: C1_BAT.1 C4_USB.1 C5_USB.1 CHG_LED.A D1.5 MCP73831.4 TP4.TP
VRTC: C8.1 C10_SUPERCAP.2 R_CAPACITOR.2 U3.14
VUSB: J2.A4 J2.A9 J2.B4 J2.B9 PFMF.050.1.1 PFMF.050.1.2

## Tracks (layer width: path | path; a pad name or v marks a point on that pad's centre or on a via)
3V3  (via drill 0.3)
  Top 0.127: U1.2 10.69,36.04 10.69,35.66 14.12,32.23 20.47,32.23 20.72,31.98 R1.1 20.85,31.98 28.59,31.98 31.39,34.77 R5.2 31.51,34.9 35.32,34.9 35.58,35.15 36.59,35.15 v36.85,34.9 47.52,24.23 | 47.52,24.23 48.15,24.86 R8.2 | 47.52,24.23 47.52,23.21 47.64,23.09 50.56,23.09 51.33,23.85 | 51.33,23.85 52.47,24.99 R7.2 52.6,24.99 53.99,24.99 R6.2 | 51.33,23.85 52.09,23.09 54.5,23.09 54.88,23.47 77.11,23.47 R_CL1.1 77.23,23.47 77.62,23.09 v77.62,22.7 | v78.38,22.2 78.38,24.1 79.01,24.74 R9.2 | v81.81,22.07 83.33,23.59 83.33,24.36 Q2.3 | 43.07,106.27 43.07,102.59 43.33,102.33 43.45,102.33 43.71,102.08 IC1.2 | 43.07,106.27 44.48,107.68 R_RESET.1 46.05,106.38 50.14,106.38 50.94,107.18 50.94,107.6 51.15,107.82 53.23,107.82 54.01,108.6 56.12,108.6 56.54,108.17 59.2,108.17 | 59.2,108.17 59.84,108.17 R_CHANGE.1 | 8.91,99.54 8.53,99.16 8.53,89.89 7.13,88.49 5.99,88.49 U2.P4 | 8.91,99.54 9.54,100.17 R10.2 | C9.1 6.75,99.54 7.39,99.54 v8.15,100.3 15.89,108.05 17.79,108.05 R_BUTTON.1 18.09,108.38 v19.47,108.38 | v8.78,99.67 8.91,99.54 | 43.07,106.27 37.36,106.27 36.21,107.41 29.68,107.41 29.2,107.9 20.76,107.9 v19.56,106.7 | v130.32,42.26 129.31,42.26 IC2.5 | v130.96,41.63 132.99,41.63 133.12,41.75 C3.+ | v135.27,40.74 135.78,41.25 137.31,41.25 C1_BAT2.1 | v136.54,39.47 136.54,37.18 137.54,36.18 137.54,32.74 136.61,31.81 136.61,30.19 137.75,29.05 144.68,29.05 154.96,18.77 164.36,18.77 J3.2 | 96.67,52.8 94.38,55.09 94.38,55.34 U3.2 | 96.67,52.8 98.44,51.02 98.44,47.34 R1_PINH1.2 | 36.59,45.31 36.98,45.69 v36.98,45.82 | 36.59,45.31 36.47,45.18 U7.3 36.59,45.31 | v37.61,46.45 37.61,47.22 38.5,48.1 43.71,48.1 44.09,47.72 U7.8
  Top 0.127: U7.7 44.21,46.45 44.21,47.6 U7.8 | 73.24,61.63 65.17,53.56 65.17,52.68 60.22,47.72 44.21,47.72 U7.8 | 73.24,61.63 73.36,71.79 TP16.TP 76.41,69.31 89.3,69.31 97.3,61.31 D7.2 97.43,61.19 97.43,58.14 99.08,56.49 R2_PINH1.2 99.21,56.36 99.84,55.72 99.84,54.71 | 96.67,52.8 98.44,54.58 99.71,54.58 99.84,54.71 | v129.81,46.33 129.81,50.39 125.5,54.71 99.84,54.71 | v59.2,100.17 59.2,108.17 | v59.84,99.54 59.84,90.4 77.78,72.45 74.2,72.45 73.41,73.24 70.75,73.24 69.78,74.22 69.78,75.57 69.08,76.27 68.1,76.27 67.4,75.57 67.4,74.59 70.3,71.68 71.44,71.68 73.41,69.71 75.4,67.64 75.4,63.8 73.24,61.63 | v36.85,35.91 36.85,43.28 37.23,43.66 37.23,44.67 36.59,45.31
  Bottom 0.127: v77.62,22.7 77.87,22.7 v78.38,22.2 81.68,22.2 v81.81,22.07 | v8.15,100.3 v8.78,99.67 | v136.54,39.47 v135.27,40.74 134.39,41.63 v130.96,41.63 v130.32,42.26 130.32,45.82 v129.81,46.33 | v37.61,46.45 v36.98,45.82 | v59.84,99.54 v59.2,100.17 | v36.85,35.91 v36.85,34.9 | v19.56,106.7 19.47,106.78 v19.47,108.38
32KHZ
  Top 0.127: R2_PINH1.1 99.08,55.09 95.9,55.09 95.65,55.34 U3.1 95.52,55.47 95.52,55.85 94.63,56.74 94,56.74 93.75,56.49 93.75,54.45 93.87,54.33 93.87,51.66 92.98,50.77 67.33,50.77 51.45,34.9 51.07,34.9 50.56,35.4 36.72,35.4 36.59,35.53 31.01,35.53 28.09,32.61 20.21,32.61 19.58,33.24 19.58,36.04 U1.9
DN
  Top 0.127: 162.07,53.06 162.71,53.06 J2.B7 | 162.07,53.06 161.94,53.18 161.94,53.69 162.2,53.95 162.71,53.95 J2.A7 | 162.07,53.06 156.61,47.6 155.47,47.6 D1.4
DP
  Top 0.127: J2.A6 162.83,53.56 163.34,53.56 163.59,53.82 163.59,54.2 163.34,54.45 162.83,54.45 J2.B6 162.71,54.45 162.2,54.45 159.15,51.41 156.99,51.41 155.47,49.88 155.47,49.5 D1.6
EPD_3V3  (via drill 0.3)
  Top 0.127: 88.28,15.08 88.67,15.08 J1.15 | 83.97,28.29 83.97,26.77 v82.32,25.12 81.3,24.1 81.3,23.47 Q2.2 | v84.22,23.34 84.35,23.47 84.86,23.47 C7.1 | v88.28,16.23 88.28,15.08 | 88.28,15.08 J1.16 | EPD_C5.1 96.54,21.43 96.92,21.43 102.17,26.68 102.17,30.98 102.06,31.09 101.22,31.09 100.46,31.85 TP17.TP 99.31,32.86 88.54,32.86 86.51,34.9 84.47,34.9 83.97,34.39 83.97,28.29 | 83.97,28.29 L1.2
  Bottom 0.127: v82.32,25.12 82.44,25.12 v84.22,23.34 88.28,19.27 v88.28,16.23
EPD_3V3_C  (via drill 0.3)
  Top 0.127: v77.62,25.5 77.23,25.12 77.23,24.86 R_CL1.2 | v78.63,25.5 81.05,25.5 81.17,25.37 Q2.1 | v59.58,49.63 59.33,49.37 25.93,49.37 22.12,53.18 22.12,53.56 U1.18 | v63.77,45.44 63.77,39.74 TP3.TP 71.32,26.64 v76.6,26.64
  Bottom 0.127: v78.63,25.5 v77.62,25.5 76.6,26.51 v76.6,26.64 | v63.77,45.44 v59.58,49.63
EPD_BUSY  (via drill 0.3)
  Top 0.127: v93.87,14.2 93.36,13.69 92.6,13.69 91.71,14.58 91.71,14.96 J1.9 | v21.48,48.23 16.91,48.23 11.96,53.18 11.96,53.56 U1.26 | v22.12,48.87 23.51,48.87 23.77,48.61 60.47,48.61 v63.65,51.79 | v96.92,17.24 104.36,24.68 104.36,25.59 104.66,25.59 108.26,21.99 111.54,21.99 112.24,21.29 112.24,18.01 TP9.TP
  Bottom 0.127: v93.87,14.2 v96.92,17.24 96.92,18.51 v63.65,51.79 | v22.12,48.87 v21.48,48.23
EPD_CS  (via drill 0.3)
  Top 0.127: v90.32,13.56 90.32,14.96 J1.12 | 79.14,21.69 79.14,23.47 R9.1 | 79.14,21.69 79.39,21.43 D6.1 79.14,21.69 | v29.86,35.02 22.75,35.02 22.12,35.66 22.12,36.04 U1.11 | v74.95,20.8 78.25,20.8 79.14,21.69 | TP10.TP 101.69,13.1 101.67,13.08 94.69,13.08 94.15,12.54 v90.32,12.54
  Bottom 0.127: v90.32,12.54 v90.32,13.56 82.19,13.56 v74.95,20.8 46.63,20.8 32.4,35.02 v29.86,35.02
EPD_DC  (via drill 0.3)
  Top 0.127: v91.71,15.85 91.21,15.85 90.82,15.46 90.82,15.08 J1.11 | v95.78,16.73 111.03,16.73 TP1.TP | v14.37,32.74 14.37,36.04 U1.5 | v13.61,31.98 13.61,25.24 12.85,24.48 12.85,23.59 26.31,10.13 v80.28,10.13
  Bottom 0.127: 93.24,15.85 94.89,15.85 v95.78,16.73 | 93.24,15.85 v91.71,15.85 | v13.61,31.98 v14.37,32.74 | v80.28,10.13 81.93,11.78 90.95,11.78 93.24,14.07 93.24,15.85
EPD_RST  (via drill 0.3)
  Top 0.127: v93.87,13.56 93.75,13.43 92.35,13.43 91.33,14.45 91.33,14.96 J1.10 | v24.4,45.95 18.31,52.04 18.31,53.56 U1.21 | v35.71,34.64 47.77,22.58 54.65,22.58 66.33,10.89 91.21,10.89 v91.84,11.53 | v97.56,17.24 109.69,17.24 111.05,18.6 TP2.TP
  Bottom 0.127: v97.56,17.24 v93.87,13.56 v91.84,11.53 | v35.71,34.64 v24.4,45.95
FLASH_CS
  Top 0.127: 31.39,37.44 31.39,38.33 30.75,38.96 30.75,40.36 31.39,40.99 D9.1 31.51,41.12 31.51,42.52 36.34,47.34 36.34,47.6 U7.1 | 31.39,37.44 31.39,36.29 R5.1 | 31.39,37.44 24.4,37.44 23.39,36.42 23.39,36.17 U1.12
GDR
  Top 0.127: J1.2 95.27,15.08 95.27,20.04 96.03,20.8 96.92,20.8 106.61,30.49 106.61,31.59 100.56,37.64 96.86,37.64 94.62,35.4 84.22,35.4 78.12,29.31 78.12,22.58 76.85,21.31 74.82,21.31 74.44,20.93 74.44,19.02 74.82,18.64 74.82,17.12 73.68,15.97 Q3.1 73.55,15.85 72.66,15.85 71.27,14.45 R4.2
GND  (via drill 0.3)  (1 unrouted)
  Top 0.127: C2_BAT.2 122.45,50.77 124.73,48.48 124.73,47.72 R2_BAT.1 124.86,47.6 124.86,47.34 128.29,43.91 129.43,43.91 132.35,46.83 132.35,48.1 131.84,48.61 131.59,48.61 MCP73831.2 131.46,48.74 131.21,48.74 130.58,49.37 130.58,49.88 132.35,51.66 135.15,51.66 C1_BAT1.2 135.27,51.79 | 141.24,50.9 141.37,51.02 U5.9 | 141.24,50.9 140.74,50.39 140.48,50.39 U5.4 140.35,50.26 140.35,45.66 138.81,44.12 138.81,32.43 139.75,31.49 139.75,30.51 139.05,29.81 138.07,29.81 137.37,30.51 137.37,31.49 138.31,32.43 138.31,45.96 137.69,46.58 135.27,46.58 130.07,41.37 126.51,41.37 IC2.2 | 141.24,50.9 142.26,50.9 U5.6 | 141.24,50.9 U5.9 | 140.86,51.66 140.48,51.66 U5.1 | 140.86,51.66 141.37,51.15 U5.9 | 135.27,51.79 135.27,55.98 140.74,61.44 141.75,61.44 142.51,60.68 142.51,53.31 140.86,51.66 | C1.2 149.24,19.66 150.13,19.66 151.53,18.26 SENSOR2.1 151.53,18.13 151.53,16.99 152.67,15.85 | C2.2 150.9,13.05 150.9,13.56 152.29,14.96 152.29,15.21 SENSOR2.7 152.42,15.34 152.42,15.59 152.67,15.85 | 153.44,15.97 152.8,15.97 152.67,15.85 | 153.44,15.97 153.56,15.97 153.94,15.59 153.94,15.34 SENSOR2.5 | 153.44,15.97 155.09,17.62 164.36,17.62 J3.1 164.48,17.75 164.74,17.75 165.63,18.64 165.63,39.21 | v159.02,50.64 157.5,50.64 R2-USB.2 | 162.71,50.64 v161.69,50.64 | 162.71,50.64 162.71,50.39 J2.A1 162.83,50.26 163.21,49.88 | 162.71,50.64 J2.B12 | 163.21,49.88 163.21,48.61 J2.MP3 163.34,48.61 165.63,48.61 | 165.63,48.61 167.15,48.61 J2.MP1 | J2.B1 162.71,56.87 162.71,56.99 J2.A12 162.83,57.12 162.83,58.39 | 162.83,58.39 163.21,58.77 J2.MP4 | 162.83,58.39 161.13,60.09 155.08,60.09 153.68,61.49 152.7,61.49 152.51,61.3 134.38,61.91 134.38,62.19 133.68,62.89 132.7,62.89 132,62.19 132,61.21 132.7,60.51 133.68,60.51 134.38,61.21 134.38,61.41 152.01,60.81 151.3,60.09 124.05,60.09 TP15.TP 127.17,59.6 135.27,51.79
  Top 0.127: 162.83,58.39 J2.MP4 | 164.48,58.9 163.34,58.9 J2.MP4 | 164.48,58.9 167.15,58.9 J2.MP2 | 163.21,49.88 163.72,49.88 164.48,50.64 164.48,58.9 | 165.63,48.61 165.63,39.21 | EPD_C1.2 76.6,17.88 76.6,18.13 75.97,18.77 75.97,19.53 76.09,19.66 77.74,19.66 78.25,19.15 EPD_C2.2 78.38,19.15 78.76,19.15 80.92,21.31 D6.2 81.05,21.43 81.05,21.94 82.7,23.59 82.7,24.86 83.2,25.37 85.62,25.37 85.74,25.5 85.74,31.59 84.47,32.86 84.47,34.52 84.6,34.64 85.87,34.64 92.09,28.42 | EPD_C12.2 83.33,20.16 82.7,20.8 82.7,21.94 83.59,22.83 85.62,22.83 86.25,23.47 C7.2 86.38,23.59 87.27,23.59 92.09,28.42 | EPD_C9.2 88.92,20.16 90.82,20.16 EPD_C8.2 90.95,20.16 92.6,20.16 EPD_C7.2 92.73,20.16 92.73,20.42 93.36,21.05 93.36,22.07 | 87.65,21.82 87.4,22.07 86.51,22.07 86.25,21.82 86.25,21.56 85.11,20.42 85.11,20.16 EPD_C11.2 | 87.65,21.82 87.65,20.8 87.01,20.16 EPD_C10.2 | 91.46,16.73 88.16,16.73 87.78,16.35 87.78,15.08 J1.17 | 91.46,16.73 92.22,15.97 92.22,15.08 J1.8 | 91.46,16.73 94.51,19.78 94.51,20.04 EPD_C6.2 94.63,20.16 95.27,20.8 95.27,21.43 95.52,21.69 | 95.52,21.69 97.17,23.34 | 97.17,23.34 99.08,25.24 99.33,25.24 D3.1 | 87.65,21.82 88.16,21.82 88.41,22.07 93.36,22.07 | 95.02,22.07 95.14,22.07 95.52,21.69 | 95.02,22.07 93.36,22.07 | 92.09,28.42 93.87,30.2 97.23,30.2 97.48,29.94 97.48,28.98 95.02,26.51 95.02,22.07 | 98.57,22.07 97.05,20.55 96.92,20.55 96.54,20.16 EPD_C5.2 | D1.2 152.8,48.48 152.55,48.48 152.04,48.99 149.37,48.99 R1-USB.1 149.24,48.99 147.47,48.99 144.93,46.45 144.93,46.2 145.56,45.56 154.07,45.56 C4_USB.2 154.2,45.56 154.83,46.2 155.97,46.2 156.1,46.07 156.1,43.66 155.85,43.41 155.09,43.41 154.45,44.04 154.2,44.04 C5_USB.2 154.07,44.04 150.13,44.04
  Top 0.127: 121.69,39.21 123.46,37.44 124.48,37.44 125.11,38.07 C1_BAT.2 125.24,38.2 132.61,38.2 133.12,38.71 C3.- 133.24,38.83 134.39,39.98 137.31,39.98 C1_BAT2.2 137.8,39.64 137.8,32.64 136.86,31.7 136.86,30.3 137.86,29.3 139.26,29.3 140.26,30.3 140.26,31.7 139.32,32.64 139.32,36.91 146.45,44.04 150.13,44.04 | 121.69,39.21 121.69,40.48 R1_PWRUSB.1 | 121.69,39.21 114.19,31.72 | 114.19,31.72 107.93,25.46 TP14.TP 117.91,24.82 111.86,30.87 | v97.3,23.34 97.17,23.34 | 98.57,22.07 v98.7,21.94 | 165.63,39.21 150.39,39.21 150.13,39.47 150.13,44.04 | 51.33,30.96 51.07,30.96 49.68,29.56 48.15,29.56 D12.2 | 51.33,30.96 54.86,31.91 D11.2 57.75,31.35 D10.2 | 91.84,45.69 93.75,43.79 C8.2 93.87,43.66 94.51,43.02 97.17,43.02 | 91.84,45.69 91.84,46.07 U3.13 91.84,45.69 | 97.17,43.02 99.71,45.56 101.49,45.56 C10_SUPERCAP.1 | 51.33,34.26 51.33,30.96 | 51.33,34.26 63.01,45.95 85.24,45.95 86.25,44.93 91.08,44.93 91.84,45.69 | 62.81,107.29 62.74,107.48 | 22.24,107.29 26.05,107.29 BOOT_BUTTON.2 26.3,106.78 30.38,106.78 C6.2 30.75,106.65 36.59,106.65 42.18,101.06 43.71,101.06 IC1.3 43.83,101.06 45.48,101.06 45.99,101.57 48.53,101.57 48.66,101.44 C_DELAY.2 48.79,101.44 51.29,103.95 52.14,103.95 52.38,104.19 52.38,106.33 52.83,106.78 | 22.74,107.29 BOOT_BUTTON.1 22.62,106.64 22.3,106.64 v20.83,105.17 | 52.09,107.29 52.13,107.38 | 52.83,106.78 52.13,107.38 | 52.13,107.38 51.93,107.56 RESET_BUTTON.2 | 5.61,90.78 5.86,90.78 U2.P6 5.61,90.78 | 5.61,90.78 3.32,93.06 3.32,93.44 U2.G4 3.32,93.57 6.62,96.87 6.62,98.14 C9.2 6.75,98.27 8.91,100.43 8.91,100.68 9.16,100.94 10.18,100.94 12.85,98.27
  Top 0.127: U2.G1 16.53,83.41 16.53,84.43 17.29,85.19 17.29,88.24 16.53,89 U2.G2 16.4,89.12 13.74,91.79 13.74,97.25 D8.2 13.74,97.38 12.85,98.27 | D9.2 31.51,39.59 35.71,43.79 36.34,43.79 U7.4 36.47,43.91 36.47,44.29 v36.72,44.55 | v38.25,44.55 39.13,44.55 40.28,45.69 U7.9 | U1.29_8 16.15,43.41 15.13,43.41 U1.29_5 15.01,43.41 | 13.86,42.13 13.86,43.28 U1.29_2 13.86,43.41 15.01,43.41 | U1.29_7 16.15,42.13 15.13,42.13 U1.29_4 15.01,42.13 13.86,42.13 | 13.86,42.13 U1.29_1 | U1.29_6 15.01,44.67 13.86,44.67 U1.29_3 13.74,44.67 13.74,47.22 9.8,51.15 | U1.29_9 16.15,44.67 15.13,44.67 U1.29_6 | 9.8,51.15 9.42,51.53 9.42,53.56 U1.28 | 15.01,43.41 15.01,44.55 U1.29_6 | U1.1 9.29,36.17 v9.29,50.64 9.29,50.9 7.89,52.3 7.89,54.07 2.31,59.66 2.31,80.23 U2.G3 2.31,80.36 2.31,87.22 5.61,90.52 5.61,90.78 | 9.8,51.15 v9.93,51.28 | 12.85,98.27 v13.23,98.27 | v48.53,34.26 51.33,34.26 | 97.17,43.02 v97.3,42.9 | 110.18,31.57 111.16,31.57 111.86,30.87 | 111.86,30.87 111.86,29.89 111.16,29.19 109.84,29.19 106.83,26.18 106.83,23.78 108.37,22.24 111.65,22.24 112.49,21.4 112.49,18.11 116.34,14.27 117.66,14.27 118.36,13.57 118.36,12.59 117.66,11.89 116.68,11.89 116.66,11.91 110.47,11.91 109.83,12.54 96.79,12.54 J1.MP1 96.67,12.42 94.38,12.42 94,12.04 83.71,12.04 83.33,12.42 J1.MP2 83.2,12.54 82.44,12.54 78.63,16.35 77.62,16.35 76.98,15.72 R2.1 76.85,15.59 76.85,13.69 75.58,12.42 74.44,12.42 73.43,13.43 72.54,13.43 72.54,14.32 R4.1 72.31,14.4 71.67,13.76 70.1,13.76 69.39,14.47 68.06,14.47 67.2,13.61 SJ1.1 | 114.19,31.72 110.33,31.72 109.48,30.87 109.48,29.89 109.65,29.72 109.6,29.67 106.17,29.67 98.57,22.07
  Top 0.127: 52.83,106.78 55.57,106.78 C5.2 55.28,107.07 v53.7,107.07 | RESET_BUTTON.1 48.62,107.29 50.68,107.29 | CHANGE_BUTTON.1 62.74,107.48 | CHANGE_BUTTON.2 66.24,107.48 | 66.24,107.48 66.95,106.78 68.34,106.78 C10\.2 | 66.24,107.48 66.04,107.29 62.38,107.29 | v61.23,107.16 62.42,107.16 62.74,107.48
  Bottom 0.127: v161.69,50.64 v159.02,50.64 | v98.7,21.94 v97.3,23.34 107.08,33.12 v97.3,42.9 | v9.29,50.64 v9.93,51.28 10.94,52.3 25.8,52.3 33.55,44.55 v36.72,44.55 v38.25,44.55 v48.53,34.26 | v20.83,105.17 13.93,98.27 v13.23,98.27 | v61.23,107.16 53.8,107.16 v53.7,107.07
  pour Bottom: 80.9,10 99,10 99,0 170.2,0 170.2,67.1 92.1,67.1 92.1,111.1 67.5,111.1 67.5,109.5 19.4,109.5 19.4,111.1 0,111.1 0,0 80.9,0
  pour Top: 80.9,10 99,10 99,0 170.2,0 170.2,67.1 92.1,67.1 92.1,111.1 67.5,111.1 67.5,109.5 19.4,109.5 19.4,111.1 0,111.1 0,0 80.9,0
GPIO8
  Top 0.127: R1.2 20.72,33.24 20.72,36.04 U1.10
I2C_PW  (via drill 0.3)
  Top 0.127: SENSOR2.2 152.29,18.26 152.29,18.51 149.88,20.93 149.24,20.93 C1.1 149.12,20.93 148.48,20.29 148.48,16.61 149.12,15.97 R1_PINH.2 | SENSOR2.6 153.05,15.21 153.05,13.05 R2_PINH.2 152.93,12.93 151.91,12.93 151.28,12.29 150.26,12.29 149.62,12.93 C2.1 | 149.5,15.85 151.02,15.85 151.53,15.34 SENSOR2.8 | 149.5,15.85 149.24,15.85 R1_PINH.2 | 149.5,15.85 149.5,13.05 C2.1 | 149.5,15.85 R1_PINH.2 | v26.05,49.88 23.39,52.55 23.39,53.56 U1.17 | v42.69,21.56 50.48,21.56 61.4,10.64 147.21,10.64 149.5,12.93 C2.1
  Bottom 0.127: v26.05,49.88 26.05,48.23 23.89,46.07 23.89,40.36 v42.69,21.56
INT_RTC  (via drill 0.3)
  Top 0.127: v94,51.15 94,50.52 98.44,46.07 R1_PINH1.1 | v93.36,51.79 93.36,55.09 93.11,55.34 U3.3 92.98,55.47 92.98,55.85 84.22,64.61 73.04,53.44 v65.68,53.44 77.78,65.54 73.59,69.89 73.6,70.91 74,71.31 74,72.29 73.3,72.99 70.65,72.99 68.59,75.05 TP5.TP | v35.58,47.22 29.1,47.22 18.31,36.42 18.31,36.17 U1.8
  Bottom 0.127: v93.36,51.79 v94,51.15 | v35.58,47.22 56.53,47.22 62.76,53.44 v65.68,53.44
IO/BOOT
  Top 0.127: C6.1 30.61,108.17 26.33,108.17 BOOT_BUTTON.3 25.55,108.68 22.24,108.68 BOOT_BUTTON.4 22.57,108.75 21,108.75 19.01,106.76 R_BUTTON.2 35.71,89.67 35.71,75.16 25.93,65.38 25.93,53.69 U1.15
IO/CHANGE  (via drill 0.3)
  Top 0.127: v35.2,75.28 15.77,55.85 15.77,53.69 U1.23 | v36.85,76.93 36.85,77.19 59.84,100.17 59.84,106.65 R_CHANGE.2 59.96,106.78 60.22,106.78 61.99,108.56 62.31,108.56 62.74,108.98 | CHANGE_BUTTON.3 66.24,108.98 | CHANGE_BUTTON.4 62.74,108.98 | 66.24,108.98 67.05,108.17 68.24,108.17 C10\.1 | 66.24,108.98 62.74,108.98
  Bottom 0.127: v36.85,76.93 v35.2,75.28
MISO  (via drill 0.3)
  Top 0.127: v8.02,90.01 6.37,91.66 6.12,91.66 U2.P7 | v8.91,89.12 8.91,64.23 11.32,61.82 TP6.TP 11.32,61.69 11.32,54.58 10.69,53.95 10.69,53.69 U1.27 10.69,53.56 10.69,53.18 18.43,45.44 24.53,45.44 27.2,48.1 36.98,48.1 37.1,47.98 37.1,47.34 36.59,46.83 | R8.1 48.28,23.72 48.91,24.36 48.91,27.15 48.15,27.91 D12.1 48.02,28.04 v41.17,34.9 | 36.59,46.83 36.47,46.71 36.47,46.45 U7.2 | v41.17,35.91 41.17,40.74 37.48,44.42 37.48,45.95 36.59,46.83
  Bottom 0.127: v8.91,89.12 v8.02,90.01 | v41.17,35.91 v41.17,34.9
MOSI  (via drill 0.3)
  Top 0.127: v51.2,35.4 44.21,42.39 44.21,43.79 U7.5 | v51.2,30.45 56.61,30.45 D11.1 61.17,25.12 | v85.74,14.07 88.67,14.07 89.17,14.58 89.17,14.96 J1.14 | v75.71,23.97 75.46,23.97 74.31,25.12 61.17,25.12 | 61.17,25.12 55.26,25.12 54.38,24.23 52.98,24.23 52.6,23.85 R7.1 | v17.04,32.74 17.04,36.04 U1.7 | v17.04,31.72 17.04,24.99 17.64,24.39 TP7.TP 40.03,24.48 v45.23,24.48 | v7.77,54.84 5.1,57.5 5.1,86.46 5.99,87.35 U2.P3
  Bottom 0.127: v51.2,35.4 v51.2,30.45 v45.23,24.48 | v85.74,14.07 77.62,22.2 77.49,22.2 v75.71,23.97 | v17.04,31.72 v17.04,32.74 7.77,42.01 v7.77,54.84
N$1
  Top 0.127: R2-USB.1 157.5,52.04 158.77,52.04 162.07,55.34 162.71,55.34 J2.B5
N$2
  Top 0.127: R1-USB.2 149.37,47.72 150.13,47.72 150.9,46.96 156.61,46.96 162.07,52.42 162.71,52.42 J2.A5
N$3
  Top 0.127: R2_BAT.2 126.13,47.72 128.8,47.72 MCP73831.5
N$4  (via drill 0.3)
  Top 0.127: v92.73,14.2 93.24,14.2 93.62,14.58 93.62,14.96 J1.5 | EPD_C2.1 v77.62,17.12
  Bottom 0.127: v92.73,14.2 90.57,12.04 82.7,12.04 v77.62,17.12
N$5
  Top 0.127: 125.75,40.23 126.38,40.23 IC2.3 | 125.75,40.23 123.72,40.23 D2.1 | 125.75,40.23 125.75,41.63 126,41.88 126.13,41.88 126.38,42.13 IC2.1 126.51,42.26 128.16,42.26 129.05,43.15 129.56,43.15 135.66,49.25 | 135.66,49.25 135.27,49.63 135.27,50.39 C1_BAT1.1 | 135.66,49.25 138.96,45.95 Q1.2
N$6
  Top 0.127: R1_BAT.1 128.92,45.82 129.94,45.82 131.46,47.34 131.46,47.72 MCP73831.1
N$7
  Top 0.127: 100.27,30.37 100.35,30.45 101.49,30.45 C4.1 | 100.27,30.37 D4.1 99.79,29.89 | 99.79,29.89 95.9,26.01 95.9,25.37 D3.2 | 99.79,29.89 100.27,30.37
N$8
  Top 0.127: CHG_LED.C 124.61,49.63 124.61,48.99 125.5,48.1 125.5,47.09 128.03,44.55 128.8,44.55 R1_BAT.2
N$9  (via drill 0.3)
  Top 0.127: v92.09,16.73 92.86,16.73 94.13,15.46 94.13,15.08 J1.4 | v89.81,14.07 89.55,14.07 88.79,13.31 83.97,13.31 78.76,18.51 77.23,18.51 76.73,19.02 EPD_C1.1
  Bottom 0.127: v92.09,16.73 91.71,16.35 91.59,16.35 89.81,14.58 v89.81,14.07
N$10
  Top 0.127: J1.24 84.09,15.08 84.09,20.67 83.46,21.31 EPD_C12.1
N$11
  Top 0.127: C_DELAY.1 48.66,102.71 46.75,102.71 46.63,102.84 IC1.5
N$12
  Top 0.127: J1.22 85.24,15.08 85.24,19.15 86.25,20.16 86.25,20.67 86.89,21.31 EPD_C10.1
N$13
  Top 0.127: R_CAPACITOR.1 93.75,57.88 93.75,59.66 95.27,61.19 D7.1
N$14  (via drill 0.3)
  Top 0.127: v86.25,15.85 86.25,15.08 J1.20 | v89.94,20.93 90.19,20.93 90.57,21.31 90.82,21.31 EPD_C8.1
  Bottom 0.127: v86.25,15.85 88.03,15.85 88.16,15.72 88.41,15.72 89.94,17.24 v89.94,20.93
N$15
  Top 0.127: J1.19 86.76,15.08 86.76,18.39 88.16,19.78 88.16,20.55 88.28,20.67 89.55,20.67 89.81,20.42 90.06,20.42 90.44,20.8 92.09,20.8 92.6,21.31 EPD_C7.1
N$16
  Top 0.127: J1.18 87.27,15.08 87.27,16.23 90.57,19.53 93.24,19.53 93.87,20.16 93.87,20.67 94.51,21.31 EPD_C6.1
PREVGH
  Top 0.127: EPD_C9.1 88.79,21.31 88.54,21.31 87.9,20.67 87.9,19.91 85.74,17.75 85.74,15.08 J1.21 85.62,14.96 85.62,14.58 85.36,14.32 83.97,14.32 82.44,15.85 82.44,22.2 84.47,24.23 84.86,24.23 86,25.37 86,31.72 85.36,32.36 85.36,33.88 D5.1
PREVGL
  Top 0.127: J1.23 84.6,15.08 84.6,19.4 84.35,19.66 84.35,20.67 84.98,21.31 EPD_C11.1 85.11,21.43 85.49,21.43 93.49,29.44 96.72,29.44 D4.2
RESE
  Top 0.127: J1.3 94.63,14.96 94.63,13.69 94,13.05 83.59,13.05 80.03,16.61 75.71,16.61 75.08,15.97 Q3.2 75.08,15.85 75.08,13.05 R3.2
RESE'
  Top 0.127: SJ1.2 70.82,13.48 74.95,11.78 R3.1 75.08,11.78 75.33,11.78 78.25,14.7 R2.2
RESET  (via drill 0.3)
  Top 0.127: IC1.1 43.79,103.7 R_RESET.2 46,105.13 51.2,105.13 v51.96,104.37 | v12.59,38.71 11.96,38.07 11.96,36.17 U1.3 | v25.67,51.79 36.34,62.45 36.34,87.79 54.18,105.64 55.54,105.64 56.12,106.22 | 55.59,107.83 C5.1 55.52,108.05 55.52,107.89 55.59,107.83 | 55.59,107.83 56.23,107.19 56.23,106.33 56.12,106.22 | RESET_BUTTON.3 51.93,108.88 | v53.63,108.81 53.56,108.88 51.93,108.88 | 51.93,108.88 50.89,108.88 50.71,108.7 48.53,108.7 RESET_BUTTON.4 | v53.08,105.77 53.53,106.22 56.12,106.22
  Bottom 0.127: v25.67,51.79 v12.59,38.71 | 52.76,107.37 51.96,106.57 v51.96,104.37 | v53.08,105.77 52.76,105.77 52.76,107.37 | v53.63,108.81 52.76,107.94 52.76,107.37
RTC_RST  (via drill 0.3)
  Top 0.127: v64.66,52.8 63.39,52.8 61.87,51.28 25.55,51.28 24.66,52.17 24.66,53.56 U1.16 | v65.68,52.8 89.43,52.8 91.71,55.09 91.71,55.34 U3.4
  Bottom 0.127: v65.68,52.8 v64.66,52.8
RX
  Top 0.127: U1.24 14.5,53.69 14.5,56.36 19.7,61.57 TP12.TP
SCK  (via drill 0.3)
  Top 0.127: v52.6,36.67 44.21,45.06 U7.6 | v79.52,19.27 79.52,18.39 84.35,13.56 88.67,13.56 89.68,14.58 89.68,14.96 J1.13 | 55.39,23.97 54.38,23.97 54.12,23.72 R6.1 | 55.39,23.97 v74.82,23.97 | 55.39,23.97 v55.39,24.61 | v15.64,32.74 15.64,36.04 U1.6 15.77,36.17 15.77,36.42 16.91,37.56 16.91,45.06 9.93,52.04 v9.93,52.42 | v4.59,58.64 4.59,88.62 5.48,89.51 5.99,89.51 U2.P5 | TP8.TP 30.65,15.3 18.74,22.99 17.34,22.99 16.64,23.69 16.64,30.72 v15.64,31.72 15.64,25.5 15.13,24.99 18.05,22.07 20.76,22.07 33.34,13.95 33.34,12.99 34.04,12.29 35.02,12.29 35.72,12.99 35.72,13.97 35.28,14.41 39.11,22.07 v52.85,22.07 | v53.49,35.78 55.09,34.19 60.64,34.19 60.75,34.07 60.75,32.65 58.79,30.69 D10.1
  Bottom 0.127: v52.6,36.67 v53.49,35.78 53.49,28.04 55.39,26.13 v55.39,24.61 v52.85,22.07 | v74.82,23.97 v79.52,19.27 | v15.64,31.72 v15.64,32.74 | v4.59,58.64 9.93,53.31 v9.93,52.42
SCL  (via drill 0.3)
  Top 0.127: v154.45,16.35 154.45,13.05 R2_PINH.1 | v153.82,16.99 153.82,18 153.94,18.13 SENSOR2.4 | v143.28,41.88 143.28,50.64 142.64,51.28 142.39,51.28 U5.7 | 160.93,24.23 164.36,20.8 J3.4 | 160.93,24.23 v144.16,40.99 | v156.36,19.53 160.93,24.1 160.93,24.23 | v62.25,51.02 60.09,48.87 23.89,48.87 19.58,53.18 19.58,53.56 U1.20 | v65.3,47.98 94.13,47.98 95.52,46.58 95.52,46.33 | 95.52,46.33 95.52,46.2 U3.16 95.52,46.33 | 95.52,46.33 v97.56,46.33
  Bottom 0.127: v154.45,16.35 v153.82,16.99 v156.36,19.53 | v144.16,40.99 v143.28,41.88 134.89,41.88 129.94,46.83 98.06,46.83 v97.56,46.33 | v65.3,47.98 v62.25,51.02
SDA  (via drill 0.3)
  Top 0.127: v151.02,17.24 150.81,17.46 R1_PINH.1 | v152.04,17.24 152.42,17.24 153.05,17.88 153.05,18.13 SENSOR2.3 | v143.91,42.52 143.91,50.52 142.77,51.66 142.39,51.66 U5.8 | v144.8,41.63 165.37,21.05 165.37,20.42 164.74,19.78 164.48,19.78 J3.3 164.36,19.66 164.1,19.66 163.47,19.02 156.23,19.02 155.47,19.78 v154.58,19.78 | v61.36,50.77 59.71,49.12 24.91,49.12 20.85,53.18 20.85,53.56 U1.19 | v64.66,47.47 93.36,47.47 94.25,46.58 94.25,46.2 U3.15 94.38,46.07 94.38,45.69 95.14,44.93 96.03,44.93 96.41,45.31 v96.41,45.82
  Bottom 0.127: v151.02,17.24 v152.04,17.24 v154.58,19.78 | v144.8,41.63 v143.91,42.52 134.64,42.52 130.07,47.09 97.68,47.09 v96.41,45.82 | v64.66,47.47 v61.36,50.77
SRC  (via drill 0.3)
  Top 0.127: v74.19,22.96 74.19,18.13 Q3.3 | v78.63,29.18 78.63,29.44 84.35,35.15 87.52,35.15 88.67,34.01 D5.2 88.79,34.01 93.58,34.01 96.97,37.39 97.95,37.39 98.65,36.69 98.65,35.71 98.78,35.71 99.97,36.89 100.95,36.89 101.65,36.19 101.65,35.21 101.53,35.09 C4.2 | v86.51,28.29 88.54,28.29 L1.1
  Bottom 0.127: v74.19,22.96 74.19,24.86 78.51,29.18 v78.63,29.18 85.62,29.18 v86.51,28.29
SS_SD
  Top 0.127: R10.1 9.67,98.9 10.56,98.9 12.08,97.38 D8.1 12.08,97.25 12.08,93.06 8.4,89.38 8.4,88.24 6.5,86.33 U2.P2 6.5,86.2 8.27,84.43 8.27,52.3 13.1,47.47 13.1,36.17 U1.4
TX
  Top 0.127: U1.25 13.23,53.69 13.23,59.53 15.39,61.69 TP11.TP
USB_D+  (via drill 0.3)
  Top 0.127: v148.23,49.5 148.48,49.76 149.75,49.76 150.01,49.5 152.8,49.5 D1.1 | v92.86,51.28 64.15,51.28 58.44,45.56 43.58,45.56 42.31,44.29 42.31,39.72 v41.67,39.09 | v29.74,36.42 26.18,36.42 25.93,36.17 U1.14
  Bottom 0.127: v148.23,49.5 146.96,50.77 94.25,50.77 94.13,50.64 93.49,50.64 v92.86,51.28 | v41.67,39.09 36.72,34.13 34.31,34.13 31.01,37.44 30.75,37.44 v29.74,36.42
USB_D-  (via drill 0.3)
  Top 0.127: v145.43,46.33 147.47,48.36 149.88,48.36 150.64,47.6 152.8,47.6 D1.3 | v129.31,50.26 126.64,50.26 125.11,51.79 109.49,51.79 93.36,35.66 84.09,35.66 77.11,28.67 77.11,26.51 76.73,26.13 54.76,26.13 v53.74,27.15 | v30.88,36.93 26.43,36.93 26.31,37.05 25.29,37.05 24.66,36.42 24.66,36.17 U1.13
  Bottom 0.127: v145.43,46.33 141.5,50.26 v129.31,50.26 | v53.74,27.15 50.56,23.97 43.83,23.97 v30.88,36.93
VBAT
  Top 0.127: 138.19,48.99 138.19,47.98 Q1.3 | 138.19,48.99 139.97,50.77 U5.3 140.35,50.9 U5.2 140.35,51.41 139.85,51.41 139.67,51.23 139.67,45.33 138.56,44.22 TP13.TP | 132.61,49.76 133.37,49.76 134.64,51.02 136.16,51.02 138.19,48.99 | 132.61,49.76 131.59,49.76 MCP73831.3 | 122.96,41.88 123.21,41.88 123.59,42.26 D2.2 123.72,42.39 124.73,43.41 129.31,43.41 132.61,46.71 132.61,49.76 | 122.96,41.88 121.69,41.88 R1_PWRUSB.2 121.56,41.88 121.05,42.39 121.05,50.77 C2_BAT.1 | 122.96,41.88 122.96,39.72 123.08,39.59 124.23,39.59 124.35,39.72 129.69,39.72 130.45,40.48 134.39,40.48 137.18,43.28 137.18,45.82 Q1.1
VBUS
  Top 0.127: MCP73831.4 128.8,49.76 126.13,49.76 CHG_LED.A 126,49.76 124.23,51.53 120.54,51.53 120.42,51.41 120.42,41.88 121.05,41.25 122.07,41.25 122.32,40.99 122.32,39.98 123.84,38.45 123.84,38.2 C1_BAT.1 123.97,38.2 125.24,39.47 131.46,39.47 132.23,40.23 136.42,40.23 136.76,40.57 137.94,40.57 138.05,40.46 138.05,32.53 137.12,31.6 137.12,30.4 137.96,29.56 139.16,29.56 140,30.4 140,31.6 139.07,32.53 139.07,37.04 145.94,43.91 145.94,44.8 | 155.47,44.8 155.47,45.44 C4_USB.1 | 155.47,44.8 155.47,44.17 C5_USB.1 | 153.31,50.26 155.09,48.48 155.34,48.48 D1.5 | 153.31,50.26 153.31,61.02 TP4.TP | 145.94,44.8 155.47,44.8 | 145.94,44.8 144.67,46.07 144.67,46.58 148.36,50.26 153.31,50.26
VRTC  (via drill 0.3)
  Top 0.127: U3.14 93.11,46.07 93.11,45.69 95.02,43.79 C8.1 95.14,43.79 97.56,43.79 101.49,47.72 C10_SUPERCAP.2 101.49,47.85 98.7,50.64 v98.7,54.07 | v97.17,55.6 95.02,57.76 R_CAPACITOR.2
  Bottom 0.127: v98.7,54.07 v97.17,55.6
VUSB
  Top 0.127: J2.A9 162.71,56.23 162.71,55.98 J2.B4 162.83,55.85 163.34,55.85 163.85,55.34 163.85,52.04 163.34,51.53 162.83,51.53 J2.B9 162.71,51.41 162.71,51.28 J2.A4 162.71,51.15 161.56,51.15 156.36,45.95 156.36,42.01 155.72,41.37 PFMF.050.1.2 155.59,41.37 151.28,41.37 PFMF.050.1.1
(copper drawn outside any net)
  shapes: Top area x10